# EAGLE board MCU board v1.3 (EAGLE 9.1.3)

Size 20.3 x 25.07 mm. Coordinates in mm from the lower left corner, seen from the top.
Outline: 0,0 20.3,0 20.3,25.07 0,25.07 0,0
Copper layers (1*16): Top 0.035mm / dielectric 1.5mm / Bottom 0.035mm
Design rules "default": minimum track width 6mil, minimum drill 0.35mm, track to track 6mil, track to pad 6mil, pad to pad 6mil, via to via 6mil, smd to smd 6mil, copper to edge 40mil, drill to drill 6mil, minimum pad ring 10mil, minimum via ring 8mil, stop-mask expansion 4mil, vias tented up to drill 0mil, thermal gap 10mil

## Footprints (pad centres in the part's own frame; a part is rotated, then mirrored left to right if it is on the bottom)
0402 = smd 0.85 x 0.9: 1 -0.58,0; 2 0.58,0
0603 = smd 1.1 x 1: 1 -0.85,0; 2 0.85,0
SOP65P780X200-28N = smd 1.8 x 0.45: 1 -3.55,4.225; 2 -3.55,3.575; 3 -3.55,2.925; 4 -3.55,2.275; 5 -3.55,1.625; 6 -3.55,0.975; 7 -3.55,0.325; 8 -3.55,-0.325; 9 -3.55,-0.975; 10 -3.55,-1.625; 11 -3.55,-2.275; 12 -3.55,-2.925; 13 -3.55,-3.575; 14 -3.55,-4.225; 15 3.55,-4.225; 16 3.55,-3.575; 17 3.55,-2.925; 18 3.55,-2.275; 19 3.55,-1.625; 20 3.55,-0.975; 21 3.55,-0.325; 22 3.55,0.325; 23 3.55,0.975; 24 3.55,1.625; 25 3.55,2.275; 26 3.55,2.925; 27 3.55,3.575; 28 3.55,4.225
SOIC127P600X175-14N = smd 1.528 x 0.65: 1 -2.711,3.81; 2 -2.711,2.54; 3 -2.711,1.27; 4 -2.711,0; 5 -2.711,-1.27; 6 -2.711,-2.54; 7 -2.711,-3.81; 8 2.711,-3.81; 9 2.711,-2.54; 10 2.711,-1.27; 11 2.711,0; 12 2.711,1.27; 13 2.711,2.54; 14 2.711,3.81
MINI-SO8 = smd 0.41 x 1.02: 1 -0.975,-2.4; 2 -0.325,-2.4; 3 0.325,-2.4; 4 0.975,-2.4; 5 0.975,2.4; 6 0.325,2.4; 7 -0.325,2.4; 8 -0.975,2.4
2X3-NS = drill 1.016 pad 1.88: 1 -2.54,-1.27; 2 -2.54,1.27; 3 0,-1.27; 4 0,1.27; 5 2.54,-1.27; 6 2.54,1.27
SMARTLED-TTW = smd 0.8 x 0.5: A 0,-0.875; C 0,0.875 | smd 0.35 x 0.35: A@1 0,-0.5; C@1 0,0.5
2,15/1,0 = drill 1.016 pad 2.159 octagon: 1 0,0
SMD1,27-2,54 = smd 1.27 x 2.54: 1 0,0
CRYSTAL-SMD-5X3.2-4PAD = smd 1.9 x 1.1: 1 -1.85,-1.15; 2 1.85,-1.15; 3 1.85,1.15; 4 -1.85,1.15

## Placement (x,y rotation side)
C1  0.1uF  [0402]  10.16,20.32 0 top
C2  10uF  [0603]  6.35,20.32 180 top
C3  22pF  [0603]  2.54,22.86 0 top
C4  22pF  [0603]  6.35,22.86 180 top
IC1  MCP25625-E_SS  [SOP65P780X200-28N]  6.35,12.7 0 top
IC2  ATTINY84-20SSU  [SOIC127P600X175-14N]  15.24,12.7 180 top
IC3  LM2936MM-5.0  [MINI-SO8]  15.24,3.81 270 top
J1  AVR_SPI_PROG_3X2NS  [2X3-NS]  6.35,3.81 0 top
LED1  [SMARTLED-TTW]  16.51,22.86 180 top
P_CANH  [2,15/1,0]  0,7.62 0 top
P_CANL  [2,15/1,0]  0,2.54 0 top
P_GND  [2,15/1,0]  0,12.7 0 top
P_I/O1  [2,15/1,0]  20.32,22.86 0 top
P_I/O2  [2,15/1,0]  20.32,17.78 0 top
P_I/O3  [2,15/1,0]  20.32,12.7 0 top
P_I/O4  [2,15/1,0]  20.32,7.62 0 top
P_I/O5  [2,15/1,0]  20.32,2.54 0 top
P_VCC  [2,15/1,0]  0,17.78 0 top
R1  10k  [0603]  2.54,20.32 180 top
RES_PAD1  [SMD1,27-2,54]  10.16,22.86 270 top
RES_PAD2  [SMD1,27-2,54]  13.97,22.86 90 top
Y1  16MHz  [CRYSTAL-SMD-5X3.2-4PAD]  15.24,19.05 0 top

## Library data of the parts
C1 = SparkFun-Capacitors; PROD_ID: CAP-12416
C2 = SparkFun-Capacitors; PROD_ID: CAP-11015
C3 C4 = SparkFun-Capacitors; PROD_ID: CAP-07876
IC1 = MCP25625-E_SS; ALLIED_NUMBER: 70415903; ALLIED_PRICE-STOCK: https://www.alliedelec.com/microchip-technology-inc-mcp25625-e-ss/70415903/; ARROW_PART_NUMBER: MCP25625-E/SS; ARROW_PRICE-STOCK: https://www.arrow.com/en/products/mcp25625-ess/microchip-technology; DESCRIPTION: CAN Controller with Transceiver SSOP28 Microchip MCP25625-E/SS, CAN Controller 1MBps CAN 2.0, 28-Pin SSOP; HEIGHT: 2mm; MANUFACTURER_NAME: Microchip; MANUFACTURER_PART_NUMBER: MCP25625-E/SS; RS_PART_NUMBER: 1651935; RS_PRICE-STOCK: http://uk.rs-online.com/web/p/products/1651935
IC2 = ATTINY84-20SSU; ARROW_PART_NUMBER: ATTINY84-20SSU; ARROW_PRICE-STOCK: https://www.arrow.com/en/products/attiny84-20ssu/microchip-technology; DESCRIPTION: ATTINY84-20SSU, 8 bit AVR Microcontroller 20MHz 8kb Flash, 512B RAM, I2C SPI 14-Pin SOIC; HEIGHT: 1.75mm; MANUFACTURER_NAME: Microchip; MANUFACTURER_PART_NUMBER: ATTINY84-20SSU; RS_PART_NUMBER: 9214633; RS_PRICE-STOCK: http://uk.rs-online.com/web/p/products/9214633
IC3 = national-semiconductor; MF: NATIONAL SEMICONDUCTOR; MPN: LM2936MM-5.0/NOPB; OC_FARNELL: 1312707; OC_NEWARK: 41K4518
J1 = SparkFun-Connectors
LED1 = led
P_CANH P_CANL P_GND P_I/O1-P_I/O5 P_VCC RES_PAD1 RES_PAD2 = wirepad
R1 = SparkFun-Resistors; PROD_ID: RES-00824
Y1 = SparkFun-Clocks; PROD_ID: XTAL-08218; SF_ID: COM-00094

## Nets
5V: C2.1 IC1.1 IC1.19 IC1.27 IC2.1 IC3.1 J1.2 R1.2
12V: C1.1 IC3.8
CANH: IC1.4 P_CANH.1
CANL: IC1.3 P_CANL.1
CLK_CAN_OUT: IC1.22 IC2.2
CS_CAN: IC1.17 IC2.3
GND: C1.2 C2.2 C3.1 C4.1 IC1.5 IC1.10 IC1.26 IC2.14 IC3.7 J1.6 P_GND.1 RES_PAD2.1
I/O1: IC2.13 P_I/O1.1
I/O2: IC2.12 P_I/O2.1
I/O3: IC2.11 P_I/O3.1
I/O4: IC2.10 P_I/O4.1
I/O5: IC2.5 P_I/O5.1
IND_LED: IC2.6 LED1.C@1
MISO: IC1.16 IC2.8 J1.1
MOSI: IC1.15 IC2.7 J1.4
N$1: C4.2 IC1.9 Y1.3
N$2: C3.2 IC1.8 Y1.1
N$3: IC1.21 IC1.28
N$4: IC1.20 IC1.24
N$5: LED1.A@1
RESET_MCU: IC2.4 J1.5 R1.1 RES_PAD1.1
SCK: IC1.14 IC2.9 J1.3
VCC: P_VCC.1

## Tracks (layer width: path | path; a pad name or v marks a point on that pad's centre or on a via)
5V  (7 unrouted)
12V  (1 unrouted)
CANH  (1 unrouted)
CANL  (1 unrouted)
CLK_CAN_OUT  (1 unrouted)
CS_CAN  (1 unrouted)
GND  (11 unrouted)
I/O1  (1 unrouted)
I/O2  (1 unrouted)
I/O3  (1 unrouted)
I/O4  (1 unrouted)
I/O5  (1 unrouted)
IND_LED  (1 unrouted)
MISO  (2 unrouted)
MOSI  (2 unrouted)
N$1  (2 unrouted)
N$2  (2 unrouted)
N$3  (1 unrouted)
N$4  (1 unrouted)
RESET_MCU  (3 unrouted)
SCK  (2 unrouted)
(copper drawn outside any net)
  shapes: Top area x2